# Altium PCB USBDM_Kinets_old.PcbDoc
Units mil, origin at the board's own origin, x right, y up, seen from the top; angles counter-clockwise.
Board outline 2207.01 x 748.03 mil, 2 copper layers (Top Layer, Bottom Layer); 29 components, 24 nets, 156 pads, 8 vias.
Unrouted connection lines stored in the file: 12.
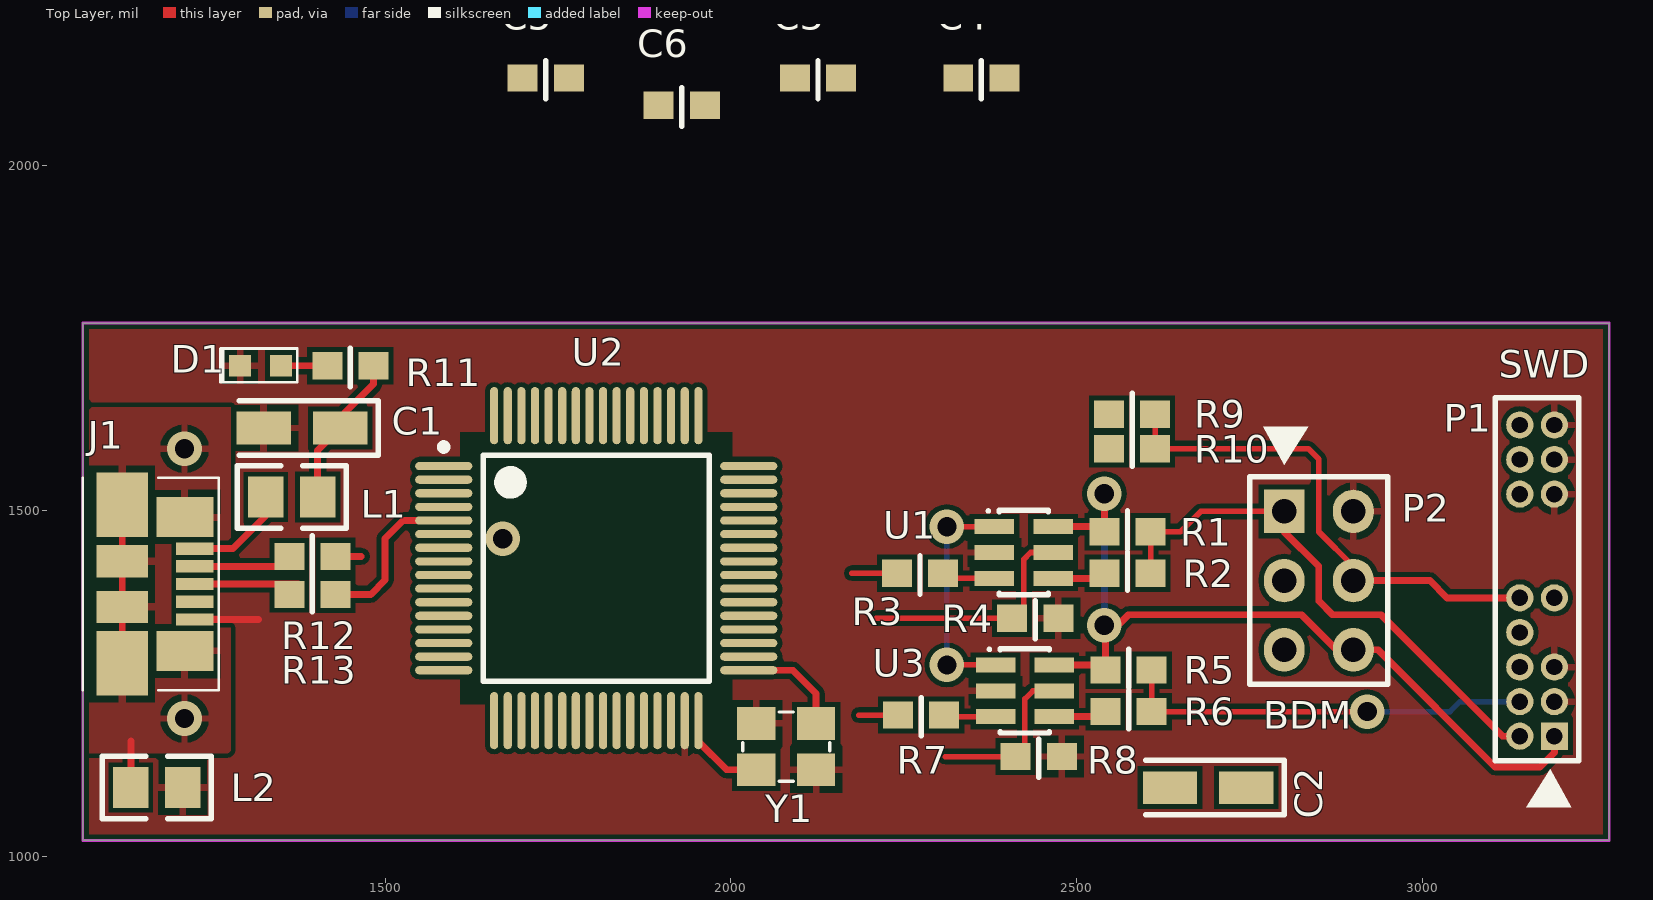
[diagram p0: Top Layer view]
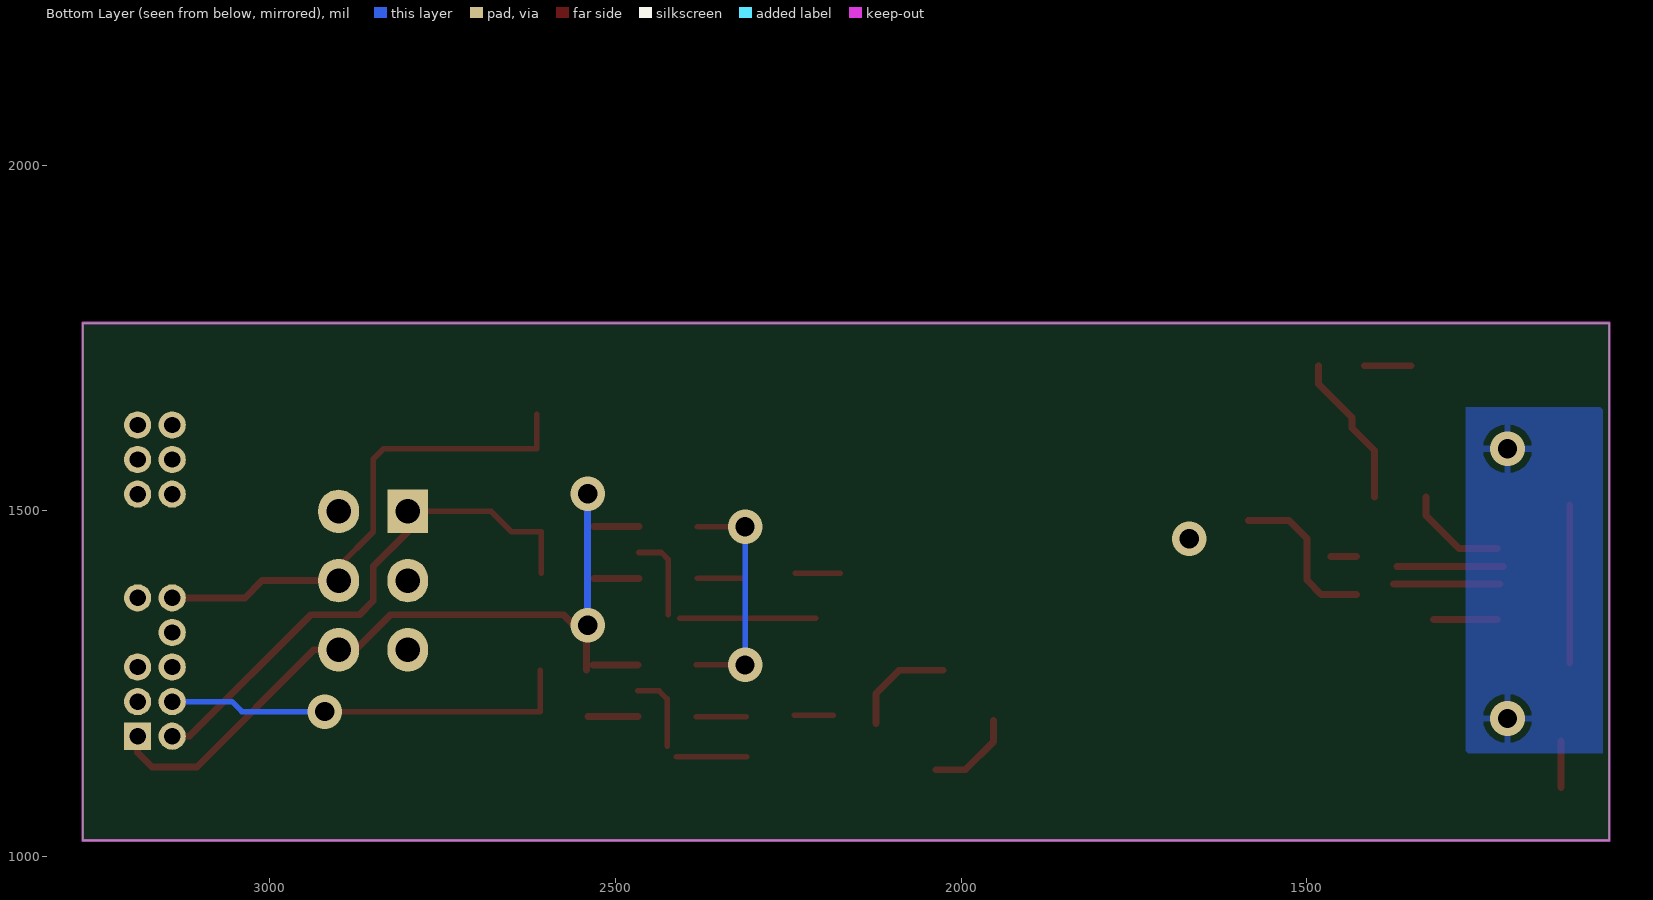
[diagram p1: Bottom Layer view, seen from below]

## Layer stack, top to bottom
Top Solder: solder mask 0.4, Solder Resist, Dk 3.5
Top Layer: signal copper 1.4
Dielectric 1: dielectric 12.6, FR-4, Dk 4.8
Bottom Layer: signal copper 1.4
Bottom Solder: solder mask 0.4, Solder Resist, Dk 3.5

## Board outline
1062.99,1023.62 1062.99,1771.65 3270,1771.65 3270,1023.62

## Design rules (kind name [scope] priority, off if disabled: settings)
Clearance [All] p1: gap=7
PolygonConnect [All] p1: connectstyle=Relief reliefconductorwidth=10 reliefentries=4 polygonreliefangle="90 Angle" airgapwidth=10
RoomDefinition USBDM_Kinetis [InComponentClass('USBDM_Kinetis')] p1: confinementstyle=ConfineIn formatcopy=TRUE lockcomponents=FALSE outline 1023.62,984.25 3976.38,984.25 3976.38,1929.13 1023.62,1929.13
RoutingVias [All] p1: holewidth=28 width=50 viastyle="Through Hole" minholewidth=28 minwidth=50 maxholewidth=28 maxwidth=50
SolderMaskExpansion [All] p1: expansion=4
Width [All] p1: maxlimit=10 minlimit=8 preferedwidth=10
30 further rules are at their usual default settings.

## Components (designator, comment, footprint, x,y, rotation, side; value= is the part's Value field where it differs from the comment)
C1 "2u2F" TC3216-1206 1380,1620 r180 top
C2 "1uF" TC3216-1206 2690,1100 r180 top
C3 "100nF" CCNP1608-0603 2125.98,2125.98 r0 top
C4 "100nF" CCNP1608-0603 2362.2,2125.98 r0 top
C5 "100nF" CCNP1608-0603 1732.28,2125.98 r0 top
C6 "100nF" CCNP1608-0603 1929.13,2086.61 r0 top
D1 "LED" LED-SMT-1 1320,1710 r180 top
J1 "USB_MICRO_B_CONNECTOR" "MOLEX - 47346-0001" 1120,1394.37 r0 top
L1 "FB" CR2012-0805 1365.07,1520 r0 top
L2 "FB" CR2012-0805 1170,1100 r180 top
P1 "MHDR2X10" MHDR2X10 3190.63,1174.37 r90 top
P2 "Transition 3x2" HDR2X3 2800,1499.37 r270 top
R1 "100K" CR1608-0603 2573.46,1470 r0 top
R2 "47R" CR1608-0603 2573.46,1410 r0 top
R3 "2K2" CR1608-0603 2273.46,1410 r180 top
R4 "2K2" CR1608-0603 2440,1345 r180 top
R5 "100K" CR1608-0603 2575,1270 r0 top
R6 "47R" CR1608-0603 2575,1210 r0 top
R7 "2K2" CR1608-0603 2275,1205 r180 top
R8 "2K2" CR1608-0603 2445,1145 r180 top
R9 "100K" CR1608-0603 2580,1640 r0 top
R10 "47R" CR1608-0603 2580,1590 r0 top
R11 "470R" CR1608-0603 1450,1710 r180 top
R12 "33R" CR1608-0603 1395,1434.37 r0 top
R13 "33R" CR1608-0603 1395,1379.37 r0 top
U1 "74LVC1T45" SO-G6/P.95 2423.46,1440 r270 top
U2 "MK22FN1M0VLH12" TSQFP50P1200X1200-64M 1805.35,1417.32 r0 top
U3 "74LVC1T45" SO-G6/P.95 2425,1240 r270 top
Y1 "ABM3B-8.000MHZ-B2-T" "Crystal_SMT - ABM8G" 2080,1159.37 r0 top

## Footprints (in the part's own frame and the unit in brackets; to place one, negate y for a bottom-side part, rotate by r counter-clockwise, add the part's x,y. Pads: shape width x height; smd on the part's side, far side on the other; paste and mask are expansions set on the pad)
CCNP1608-0603 [mm]
  rect 1.1x1 smd: 1(-0.85,0) 2(0.85,0)
  silkscreen extent 0,-0.76 0,0.64
CR1608-0603 [mm]
  rect 1.1x1 smd: 1(-0.85,0) 2(0.85,0)
  silkscreen extent 0,-0.64 0,0.76
CR2012-0805 [mm]
  rect 1.3x1.5 smd: 1(-0.95,0) 2(0.95,0)
  silkscreen extent -2,-1.15 2,1.15
"Crystal_SMT - ABM8G" [mm] "Crystal SMT low profile 3.2 x 2.5"
  rect 1.4x1.2 smd: 1(-1.1,-0.85) 2(1.1,-0.85) 3(1.1,0.85) 4(-1.1,0.85)
  silkscreen extent -1.6,-1.27 1.6,1.27
HDR2X3 [mm] "Connector; Header; 3x2 Position"
  rect 1.6x1.5 hole 0.9: 1(0,0)
  oval 1.6x1.5 hole 0.9: 2(0,2.54) 3(2.54,0) 4(2.54,2.54) 5(5.08,0) 6(5.08,2.54)
  silkscreen extent -1.27,-1.27 6.35,3.81
LED-SMT-1 [mm] "Small SMT LED HSMx-C190"
  rect 0.8x0.8 smd: A(-0.75,0) K(0.75,0)
  silkscreen extent -1.35,-0.64 1.47,0.61
MHDR2X10 [mm] "Connector; Header; 10x2 Position"
  rect 1x1 hole 0.6: 1(0,0)
  round 1 hole 0.6: 2(0,1.27) 3(1.27,0) 4(1.27,1.27) 5(2.54,0) 6(2.54,1.27) 8(3.81,1.27) 9(5.08,0) 10(5.08,1.27) 15(8.89,0) 16(8.89,1.27) 17(10.16,0) 18(10.16,1.27) 19(11.43,0) 20(11.43,1.27)
  silkscreen extent -0.9,-0.9 12.43,2.17
"MOLEX - 47346-0001" [mm] "RECEPTACLE, MICRO USB B, BOTTOM MOUNT"
  rect 1.38x0.45 smd: D+(2.66,0) D-(2.66,0.65) G(2.66,-1.3) ID(2.66,-0.65) Vbus(2.66,1.3)
  rect 1.9x2.38 smd: S1(0,2.91) S4(0,-2.91)
  rect 1.9x1.18 smd: S2(0,0.838) S3(0,-0.838)
  rect 2.1x1.48 smd: S5(2.3,2.46) S6(2.3,-2.46)
  silkscreen extent -1.45,-3.9 3.55,3.9
SO-G6/P.95 [mm] "SOT-457/SC-74; 6 Leads; Body 3.1 x 3 mm, inc. leads (LxW max)"
  rect 0.55x1.45 smd: 1(-0.95,-1.075) 2(0,-1.075) 3(0.95,-1.075) 4(0.95,1.075) 5(0,1.075) 6(-0.95,1.075)
  silkscreen extent -1.57,-1.35 1.55,0.9
TC3216-1206 [mm]
  rect 2x1.2 smd: 1(-1.4,0) 2(1.4,0)
  silkscreen extent -2.8,-1 2.3,1
TSQFP50P1200X1200-64M [mm] "Thin QFP, 64-Leads, Body 10x10mm, Pitch 0.5mm, IPC Low Density"
  oval 2.1x0.3 smd: 1(-5.6,3.75) 2(-5.6,3.25) 3(-5.6,2.75) 4(-5.6,2.25) 5(-5.6,1.75) 6(-5.6,1.25) 7(-5.6,0.75) 8(-5.6,0.25) 9(-5.6,-0.25) 10(-5.6,-0.75) 11(-5.6,-1.25) 12(-5.6,-1.75) 13(-5.6,-2.25) 14(-5.6,-2.75) 15(-5.6,-3.25) 16(-5.6,-3.75) 33(5.6,-3.75) 34(5.6,-3.25) 35(5.6,-2.75) 36(5.6,-2.25) 37(5.6,-1.75) 38(5.6,-1.25) 39(5.6,-0.75) 40(5.6,-0.25) 41(5.6,0.25) 42(5.6,0.75) 43(5.6,1.25) 44(5.6,1.75) 45(5.6,2.25) 46(5.6,2.75) 47(5.6,3.25) 48(5.6,3.75)
  oval 0.3x2.1 smd: 17(-3.75,-5.6) 18(-3.25,-5.6) 19(-2.75,-5.6) 20(-2.25,-5.6) 21(-1.75,-5.6) 22(-1.25,-5.6) 23(-0.75,-5.6) 24(-0.25,-5.6) 25(0.25,-5.6) 26(0.75,-5.6) 27(1.25,-5.6) 28(1.75,-5.6) 29(2.25,-5.6) 30(2.75,-5.6) 31(3.25,-5.6) 32(3.75,-5.6) 49(3.75,5.6) 50(3.25,5.6) 51(2.75,5.6) 52(2.25,5.6) 53(1.75,5.6) 54(1.25,5.6) 55(0.75,5.6) 56(0.25,5.6) 57(-0.25,5.6) 58(-0.75,5.6) 59(-1.25,5.6) 60(-1.75,5.6) 61(-2.25,5.6) 62(-2.75,5.6) 63(-3.25,5.6) 64(-3.75,5.6)
  silkscreen extent -5.72,-4.15 4.15,4.57, body extent -5,-5 5,5, height 1.6

## Part data
C1 C2: library part "Cap Polar", "Polarized Capacitor"
C3 C4 C5 C6: library part Cap, "Capacitor"
J1: "USB Micro-B Connector"
L1 L2: library part "Ferrite Bead", "Ferrite Bead (0805)"
P1: "Header, 10-Pin, Dual row .05\""
P2: library part "Header 3X2", "2x3 male header"
R1 R2 R3 R4 R5 R6 R7 R8 R9 R10 R11: library part Res, "Resistor SMT"
R12 R13: library part Res, "Resistor"
U1 U3: "Dual voltage bidirection buffer"
U2: "Arm Cortex M4F"
Y1: library part XTAL_SMT2, "Crystal (ULTRA MINIATURE SMT ABM8G)"

## Via types
v1: diameter 50, hole 28, Top Layer to Bottom Layer, 8 vias

## Nets (pads, with @x,y where several pads share a name; then routed paths per layer and width w, separated by ;. In a path a pad name is that pad's centre, name@x,y a point inside that pad or via, vN(x,y) a via of type N, cw(c..) or ccw(c..) an arc to the next point about the centre after c; other vN are vias at no path point)
3V3: C3.2 C4.2 C5.2 C6.2 U1.1 U2.7 U3.1 | length 339
  Top Layer w8: v1(2312.4,1277.4) U3.1 ; v1(2312.4,1477.4) U1.1
  Bottom Layer w8: v1(2312.4,1277.4) v1(2312.4,1477.4)
5V: C1.1 L1.2 R11.1 U2.8 | length 223.5
  Top Layer w10: L1.2 1402.47,1587.35 C1.1 1435.12,1635.12 1483.46,1683.46 R11.1
BKGD/SWD: R3.2 | length 65
  Top Layer w8: 2175,1410 R3.2
BKGD/SWD_DIR: R4.2 U1.5 | length 323
  Top Layer w8: 2210,1345 R4.2 ; R4.2@2423.46,1350 2423.46,1430 2433.46,1440 U1.5
EXTAL: U2.33 Y1.3 | length 154.6
  Top Layer w10: U2.33 2089.68,1269.69 2123.31,1236.06 Y1.3
GND: C1.2 C3.1 C4.1 C5.1 C6.1 D1.K J1.G L2.1 P1.3 P1.5 P1.15 P1.17 P1.19 P2.2 R4.1 R8.1 U1.2 U2.31 U3.2 Y1.2 Y1.4 | length 92.1
  Top Layer w10: J1.G 1316.81,1343.19
NetD1_1: D1.A R11.2 | length 67
  Top Layer w10: D1.A R11.2
NetJ1_D+: J1.D+ R13.1 | length 154.2
  Top Layer w10: J1.D+@1220.79,1394.37 R13.1@1375,1394.37
NetJ1_D-: J1.D- R12.1 | length 154.2
  Top Layer w10: J1.D-@1215.79,1419.96 R12.1@1370,1419.96
NetJ1_S1: J1.S1 J1.S2 J1.S3 J1.S4 J1.S5 J1.S6 L2.2 | length 296.5
  Top Layer w10: J1.S4 J1.S3 J1.S2 J1.S1 ; L2.2 1132.6,1167.4
  other v1: 1210,1200 1210,1590
NetJ1_VBUS: J1.Vbus L1.1 | length 149.5
  Top Layer w10: J1.Vbus 1280,1445.55 1327.67,1493.22 L1.1
NetR2_1: R2.1 U1.4 | length 65.1
  Top Layer w10: U1.4 R2.1@2530.87,1402.6
NetR3_1: R3.1 U1.3 | length 66.8
  Top Layer w8: R3.1@2314.33,1402.6 U1.3
NetR6_1: R6.1 U3.4 | length 72
  Top Layer w10: U3.4 R6.1@2539.28,1202.6
NetR7_1: R7.1 U3.3 | length 71.8
  Top Layer w8: R7.1@2310.87,1202.6 U3.3
SWCLK: R7.2 | length 56.5
  Top Layer w8: 2185,1205 R7.2
SWD_EN: R8.2 U3.5 | length 217
  Top Layer w8: 2310,1145 R8.2 ; R8.2@2425,1160 2425,1228.22 2436.78,1240 U3.5
T_BKGD/SWD: P1.2 P2.1 R1.2 R2.2 | length 787
  Top Layer w8: R2.2 R1.2 2650,1470 2679.37,1499.37 P2.1
  Top Layer w10: P2.1 2800,1470 2850,1420 2850,1370 2870,1350 2940,1350 3115.63,1174.37 P1.2
T_RST: P1.10 P2.4 R9.2 R10.2 | length 740.1
  Top Layer w8: R9.2 R10.2 2835,1590 2850,1575 2850,1470 2900,1420 P2.4
  Top Layer w10: P2.4 3010.63,1399.37 3035.63,1374.37 P1.10
T_SWCLK: P1.4 R5.2 R6.2 | length 598.1
  Top Layer w8: R5.2 R6.2 v1(2920,1210)
  Bottom Layer w8: v1(2920,1210) 3040,1210 3054.37,1224.37 P1.4
USB_DM: R12.2 U2.6 | length 37.2
  Top Layer w10: R12.2 1465.63,1434.37
USB_DP: R13.2 U2.5 | length 235.8
  Top Layer w10: R13.2 1479.37,1379.37 1500,1400 1500,1460 1526.22,1486.22 U2.5
VDD_BDM: P1.1 P2.6 R1.1 R5.1 R9.1 U1.6 U3.6 | length 1198.1
  Top Layer w10: U1.6 R1.1@2530.87,1477.4 ; U3.6 R5.1@2532.4,1277.4 ; R1.1 v1@2540,1515 ; R5.1 2541.54,1316.54 2575,1350 2825,1350 2875.63,1299.37 P2.6 2935.63,1299.37 3105,1130 3170,1130 3190.63,1150.63 P1.1
  Bottom Layer w10: v1(2540,1335) v1(2540,1525)
XTAL: U2.32 Y1.1 | length 130.9
  Top Layer w10: U2.32 1952.99,1166.38 1993.46,1125.91 Y1.1
pads on no net: C2.1 C2.2 J1.ID P1.6 P1.8 P1.9 P1.16 P1.18 P1.20 P2.3 P2.5 R10.1 U2.1 U2.2 U2.3 U2.4 U2.9 U2.10 U2.11 U2.12 U2.13 U2.14 U2.15 U2.16 U2.17 U2.18 U2.19 U2.20 U2.21 U2.22 U2.23 U2.24 U2.25 U2.26 U2.27 U2.28 U2.29 U2.30 U2.34 U2.35 U2.36 U2.37 U2.38 U2.39 U2.40 U2.41 U2.42 U2.43 U2.44 U2.45 U2.46 U2.47 U2.48 U2.49 U2.50 U2.51 U2.52 U2.53 U2.54 U2.55 U2.56 U2.57 U2.58 U2.59 U2.60 U2.61 U2.62 U2.63 U2.64
copper on no net:
  other v1: 1670,1460

## Polygon pours and split planes (outlines as drawn)
NetJ1_S1 on Top Layer "Top Layer-No Net" (solid, remove dead copper, pour order 8): 1070,1650 1277.12,1650 1277.12,1150 1070,1150
GND on Top Layer "Top Layer-No Net" (solid, remove dead copper, pour order 5): 1062.99,1023.62 1062.99,1771.65 3270,1771.65 3270,1023.62
NetJ1_S1 on Bottom Layer "Top Layer-No Net" (solid, remove dead copper, pour order 6): 1062.99,1650 1270.11,1650 1270.11,1150 1062.99,1150

## Keep-outs
Keep-Out Layer:
  the board outline again, w3.94

## Other copper
Top Layer:
  pour cut-out: 1608.5,1614.17 2002.2,1614.17 2002.2,1220.47 1608.5,1220.47

## Silkscreen, mask and mechanical layers (free items; w line width, h text height)
Top Overlay:
  region: 3215,1071.87 3150,1071.87 3185,1126.87
  region: 2770,1621.87 2835,1621.87 2800,1566.87
  text "SWD" at 3110.24,1692.91 h40
  text "BDM" at 2770,1185 h40